# Altium PCB PCB2.PcbDoc
Units mm, origin at the board's own origin, x right, y up, seen from the top; angles counter-clockwise.
Board outline 41.27 x 16 mm, 2 copper layers (Top Layer, Bottom Layer); 37 components, 26 nets, 124 pads, 11 vias.
Unrouted connection lines stored in the file: 7.
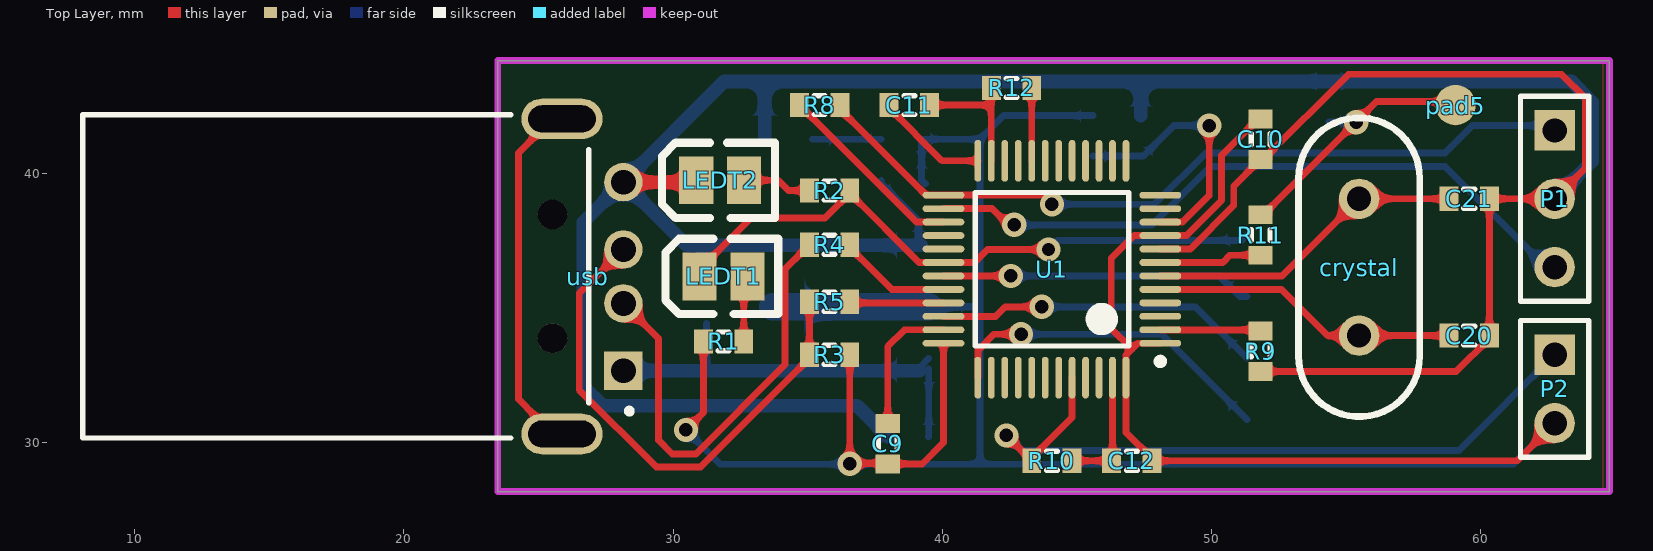
[diagram p0: Top Layer view]
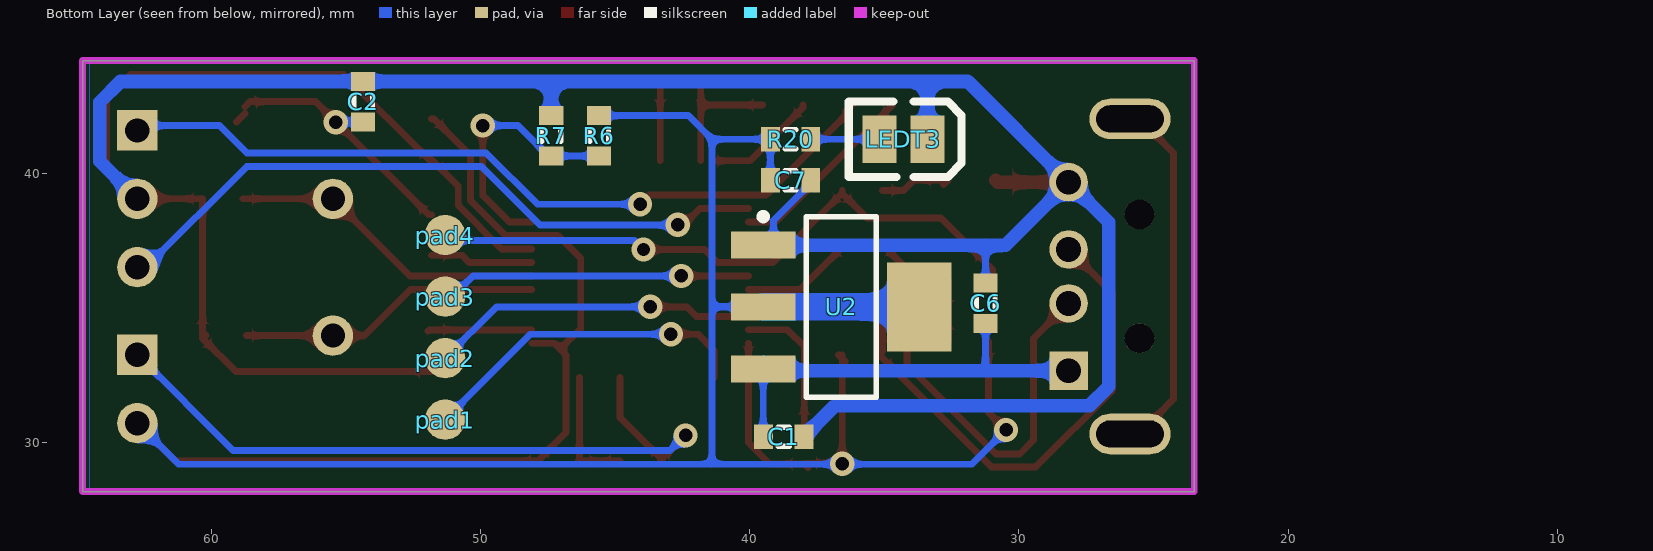
[diagram p1: Bottom Layer view, seen from below]

## Layer stack, top to bottom
Top Solder: solder mask 0.0102, Solder Resist, Dk 3.5
Top Layer: signal copper 0.0356
Dielectric 1: dielectric 0.32, FR-4, Dk 4.8
Bottom Layer: signal copper 0.0356
Bottom Solder: solder mask 0.0102, Solder Resist, Dk 3.5

## Board outline
23.495,44.196 64.77,44.196 64.77,28.194 23.495,28.194

## Design rules (kind name [scope] priority, off if disabled: settings)
Clearance [All] p1: gap=0.2 ignorepadtopadclearanceinfootprint=FALSE
PolygonConnect [All] p1: connectstyle=Direct reliefconductorwidth=0.254 reliefentries=4 polygonreliefangle="90 Angle" airgapwidth=0.254
RoutingVias [All] p1: holewidth=0.711 width=1.27 viastyle="Through Hole" minholewidth=0.711 minwidth=1.27 maxholewidth=0.711 maxwidth=1.27
SolderMaskExpansion [All] p1: expansion=0.102
Width [All] p1: maxlimit=1.27 minlimit=0.254 preferedwidth=0.254
30 further rules are at their usual default settings.

## Components (designator, comment, footprint, x,y, rotation, side; value= is the part's Value field where it differs from the comment)
C1 "C0603" J1-0603 38.735,30.226 r180 bottom value=0.1uF
C2 "C0603" J1-0603 54.356,42.672 r270 bottom value=0.1uF
C6 "10uF" J1-0603 31.242,35.181 r90 bottom value=1.0uF
C7 "10uF" J1-0603 38.481,39.751 r180 bottom value=1.0uF
C9 "C0603" J1-0603 37.973,29.972 r270 top value=0.1uF
C10 "C0603" J1-0603 51.816,41.275 r90 top value=0.1uF
C11 "C0603" J1-0603 38.775,42.545 r180 top value=0.1uF
C12 "C0603" J1-0603 47.038,29.337 r0 top value=0.1uF
C20 "C0603" J1-0603 59.563,33.984 r180 top value=20pF
C21 "C0603" J1-0603 59.563,39.064 r180 top value=20pF
crystal "clockProducerDeep" "deep crystal" 55.626,36.449 r0 top
LEDT1 "" 3518 31.877,36.183 r180 top
LEDT2 "" 3518 31.75,39.751 r180 top
LEDT3 "" 3518 34.29,41.275 r180 bottom
P1 "Header 3" HDR1X3 62.738,41.604 r270 top
P2 "Header 2" HDR1X2 62.738,33.274 r270 top
pad1 "pad" pad!#1 51.308,30.861 r270 bottom
pad2 "pad" pad!#1 51.308,33.147 r270 bottom
pad3 "pad" pad!#1 51.308,35.433 r270 bottom
pad4 "pad" pad!#1 51.308,37.719 r270 bottom
pad5 "pad" pad!#2 59.055,42.545 r90 bottom
R1 "Res1" j1-0603 31.877,33.77 r0 top value=220
R2 "Res1" j1-0603 35.814,39.37 r180 top value=220
R3 "Res1" J1-0603 35.814,33.274 r0 top value=1.5k
R4 "Res1" J1-0603 35.814,37.359 r0 top value=22
R5 "Res1" J1-0603 35.814,35.238 r0 top value=22
R6 "Res1" J1-0603 45.593,41.402 r90 bottom value=47K
R7 "Res1" J1-0603 47.371,41.402 r270 bottom value=47k
R8 "Res1" J1-0603 35.445,42.545 r0 top value=330
R9 "Res1" J1-0603 51.816,33.401 r90 top value=10K
R10 "Res1" J1-0603 44.069,29.337 r0 top value=100K
R11 "Res1" J1-0603 51.816,37.719 r90 top value=100k
R12 "Res1" J1-0603 42.573,43.18 r180 top value=10K
R20 "Res1" j1-0603 38.481,41.275 r180 bottom value=220
U1 "STM32F103C8T6TR" STM-LQFP48_L 44.069,36.449 r180 top locked
U2 "REG1117-3.3" SOT223 36.597,35.052 r180 bottom
usb "usb_typeA_Deep" usb_typeA_Deep 17.957,36.231 r270 top locked

## Footprints (in the part's own frame and the unit in brackets; to place one, negate y for a bottom-side part, rotate by r counter-clockwise, add the part's x,y. Pads: shape width x height; smd on the part's side, far side on the other; paste and mask are expansions set on the pad)
3518 [mil]
  rect 50x70 smd: 1(35,0) 2(-35,0)
  silkscreen extent -80,-55 85,55
"deep crystal" [mm]
  round 1.5 hole 0.9: 1(-0.15,-2.465) 2(-0.15,2.615)
  silkscreen extent -2.4,-5.47 2.1,5.62, body extent -2.44,-5.46 2.16,5.54, height 3.8
HDR1X2 [mm] "Connector; Header; 2 Position"
  rect 1.5x1.5 hole 0.9: 1(0,0)
  round 1.5 hole 0.9: 2(2.54,0)
  silkscreen extent -1.27,-1.27 3.81,1.27
HDR1X3 [mm] "Connector; Header; 3 Position"
  rect 1.5x1.5 hole 0.9: 1(0,0)
  round 1.5 hole 0.9: 2(2.54,0) 3(5.08,0)
  silkscreen extent -1.27,-1.27 6.35,1.27
J1-0603 [mm] "Chip Resistor, Body 1.6x0.8mm, IPC High Density"
  rect 0.7x0.9 smd: 1(-0.75,0) 2(0.75,0)
  silkscreen extent -0.2,-0.35 0.2,0.35, body extent -0.85,-0.48 0.85,0.48, height 0.9
j1-0603 [mm] "Chip Resistor, Body 1.6x0.8mm, IPC High Density"
  rect 0.7x0.9 smd: 1(-0.75,0) 2(0.75,0)
  silkscreen extent -0.2,-0.35 0.2,0.35, body extent -0.85,-0.48 0.85,0.48, height 0.9
pad!#1 [mm]
  round 1.5 smd: 1(0,0)
pad!#2 [mm]
  round 1.5 smd far side: 1(0,0)
SOT223 [mm] "SOT223, 4-Leads, Body 6.7x7.3mm (max), Pitch 2.30mm, IPC Medium Density"
  rect 2.4x1 smd: 1(-2.9,2.3) 2(-2.9,0) 3(-2.9,-2.3)
  rect 2.4x3.3 smd: 4(2.9,0)
  silkscreen extent -3.03,-3.35 1.3,3.47, body extent -1.85,-3.35 1.85,3.35, height 1.8
STM-LQFP48_L [mm] "QFP, 48-Leads, Body 7x7mm, Pitch 0.5mm, IPC High Density"
  oval 1.55x0.25 smd: 1(-4.025,2.75) 2(-4.025,2.25) 3(-4.025,1.75) 4(-4.025,1.25) 5(-4.025,0.75) 6(-4.025,0.25) 7(-4.025,-0.25) 8(-4.025,-0.75) 9(-4.025,-1.25) 10(-4.025,-1.75) 11(-4.025,-2.25) 12(-4.025,-2.75) 25(4.025,-2.75) 26(4.025,-2.25) 27(4.025,-1.75) 28(4.025,-1.25) 29(4.025,-0.75) 30(4.025,-0.25) 31(4.025,0.25) 32(4.025,0.75) 33(4.025,1.25) 34(4.025,1.75) 35(4.025,2.25) 36(4.025,2.75)
  oval 0.25x1.55 smd: 13(-2.75,-4.025) 14(-2.25,-4.025) 15(-1.75,-4.025) 16(-1.25,-4.025) 17(-0.75,-4.025) 18(-0.25,-4.025) 19(0.25,-4.025) 20(0.75,-4.025) 21(1.25,-4.025) 22(1.75,-4.025) 23(2.25,-4.025) 24(2.75,-4.025) 37(2.75,4.025) 38(2.25,4.025) 39(1.75,4.025) 40(1.25,4.025) 41(0.75,4.025) 42(0.25,4.025) 43(-0.25,4.025) 44(-0.75,4.025) 45(-1.25,4.025) 46(-1.75,4.025) 47(-2.25,4.025) 48(-2.75,4.025)
  silkscreen extent -4.15,-2.85 2.85,3.55, body extent -3.5,-3.5 3.5,3.5, height 1.6
usb_typeA_Deep [mm]
  rect 1.428x1.428 hole 0.92: 01(3.55,10.2)
  round 1.428 hole 0.92: 02(1.05,10.2) 03(-0.95,10.2) 04(-3.45,10.2)
  oval 1.508x3.016 hole 1 slot 2.5 at 90 deg: S1(-5.8,7.92) S2(5.9,7.92)
  round 1.1 hole 1.1 unplated: ""(-2.25,7.57) ""(2.35,7.57)
  silkscreen extent -5.95,-9.88 6.05,10.52

## Part data
C1 C2 C9 C10 C11 C12 C20 C21: "Ceramic Chip Capacitor - Standard", PackageDocument=Mar-2001, Code_IPC="1608 [0603]", Code_JEITA=0603, ComponentLink1Description="Manufacturer Link", ComponentLink1URL=http://www.kemet.com/, ComponentLink2Description=Datasheet, ComponentLink2URL=http://www.kemet.com/kemet/web/homepage/kechome.nsf/vapubfilesname/F3102TA.pdf/$file/F3102TA.pdf, DatasheetDocument=Mar-2001, LatestRevisionDate=19-Mar-2004, LatestRevisionNote="Silkscreen size reduced.", Note="Footprint corresponds to dimensions for bulk cassette packaging. This case size has tightened tolerances.", PackageReference=0603, Published=17-Jul-2002, Publisher="Altium Limited"
C6 C7: library part 194D105X0015B2, ComponentLink1Description="Manufacturer Link", ComponentLink1URL=http://www.vishay.com/, ComponentLink2Description=Datasheet, ComponentLink2URL=http://www.vishay.com/docs/40000/194d.pdf, DatasheetDocument=05-Jul-2002, Note="See Data Sheet for full range of components", PackageReference=B, Published=19-Mar-2004, Publisher="Altium Limited"
crystal: library part "deep crystal"
LEDT1 LEDT2 LEDT3: library part LED3, "Typical BLUE SiC LED", PackageDocument=16-Apr-2002, DatasheetDocument=16-Apr-2002, LatestRevisionDate=17-Dec-2003, LatestRevisionNote="PCB Footprint replaced.", PackageReference=3.5X2.8X1.9, Published=8-Jun-2000, Publisher="Altium Limited"
P1: "Header, 3-Pin", LatestRevisionDate=17-Jul-2002, LatestRevisionNote="Re-released for DXP Platform.", Publisher="Altium Limited"
P2: "Header, 2-Pin", LatestRevisionDate=17-Jul-2002, LatestRevisionNote="Re-released for DXP Platform.", Publisher="Altium Limited"
pad1 pad2 pad3 pad4 pad5: library part pad!, "test pad"
R1 R2 R3 R4 R5 R6 R7 R8 R9 R10 R11 R12 R20: "Resistor", LatestRevisionDate=17-Jul-2002, LatestRevisionNote="Re-released for DXP Platform.", PackageReference=AXIAL-0.3, Published=8-Jun-2000, Publisher="Altium Limited"
  R3 R4 R5 R6 R7 R8 R9 R10 R11 R12: PackageDescription="Axial Device, Thru-Hole; 2 Leads; 0.3 in Pin Spacing"
U1: "ARM Cortex-M3 32-bit MCU, 64 KB Flash, 20 KB Internal RAM, 37 I/Os, 48-pin LQFP, -40 to 85 degC, Tape and Reel", I/Os (High Current)=37, Operating Frequency(F) (Processor speed) (MHz)=72, Supplier Part Number 1=STM32F103C8T6TR-ND, Supply Voltage(Vcc) min (V)=2, A/D Converter="2x12-bit (10 Channel)", ComponentLink1Description="Manufacturer URL", ComponentLink1URL=http://www.st.com/web/en/home.html, ComponentLink2Description=Datasheet, ComponentLink2URL=http://www.st.com/st-web-ui/static/active/en/resource/technical/document/datasheet/CD00161566.pdf, ComponentLink3Description="Package Specification", ComponentLink3URL=http://www.st.com/st-web-ui/static/active/en/resource/technical/document/datasheet/DM00058181.pdf, Core="ARM Cortex-M3", DatasheetVersion="Rev. 16", FLASH Size (Prog) (kB)=64, Internal RAM Size (kB)=20, Mounting Technology="Surface Mount", PackageDescription="48-Pin Low Profile Quad Flat Package, 7 x 7 mm Body, 0.5 mm Pitch", PackageReference=LQFP48, PackageVersion="Rev. 6, 06/2013", Packing="Tape and Reel", PartNumber=STM32F103C8T6TR, Supplier 1=Digi-Key, Supplier 2=Mouser, Supplier Part Number 2=511-STM32F103C8T6TR
U2: "800mA and 1A Low Dropout Positive Regulator 2.85V, 3.3V, 5V, and Adjustable", ComponentLink1Description="Manufacturer Link", ComponentLink1URL=http://www.ti.com/, ComponentLink2Description=Datasheet, ComponentLink2URL=http://www-s.ti.com/sc/ds/REG1117.pdf, DatasheetVersion=Sep-1997, LatestRevisionDate=17-Jul-2002, LatestRevisionNote="Re-released for DXP Platform.", PackageDescription="SOT-223/SC-73; 4 Leads; Body 6.7 x 7.3 mm, inc. leads (LxW max)", PackageReference=ZZ311, PackageVersion=revC, Published=8-Jun-2000, Publisher="Altium Limited"

## Via types
v1: diameter 0.9, hole 0.5, Top Layer to Bottom Layer, 11 vias

## Nets (pads, with @x,y where several pads share a name; then routed paths per layer and width w, separated by ;. In a path a pad name is that pad's centre, name@x,y a point inside that pad or via, vN(x,y) a via of type N, cw(c..) or ccw(c..) an arc to the next point about the centre after c; other vN are vias at no path point)
+3V3: C7.1 C9.2 C10.2 C11.2 C12.2 P2.2 R1.1 R3.2 R6.2 R20.1 U1.1 U1.9 U1.24 U1.36 U1.48 U2.2 U2.4 | length 115.3
  Top Layer w0.254: v1(30.48,30.48) 31.127,31.127 R1.1 ; R3.2@36.449,33.02 R3.2@36.564,33.135 ; R3.2 R3.2@36.564,33.135 ; R3.2@36.691,33.274 36.697,33.268 R3.2@36.564,33.135 ; C9.2@37.84,29.083 C9.2@37.973,29.216 ; C9.2@37.84,29.183 C9.2@37.934,29.183 ; C9.2@37.91,29.158 C9.2@37.934,29.183 ; C11.2 38.025,42.445 39.996,40.474 U1.24 ; U1.36 40.044,30.011 39.255,29.222 C9.2 ; U1.1 47.257,33.699 47.038,33.48 ; C10.2 51.716,42.025 50.365,40.674 50.365,39.002 49.064,37.701 48.096,37.701 U1.9 48.092,37.697 47.125,37.697 46.271,36.843 46.271,34.247 47.038,33.48 ; P2.2 61.341,29.337 60.579,29.337 47.867,29.337 46.819,30.385 U1.48 46.819,33.261 47.038,33.48 ; R3.2@36.564,33.135 v1(36.564,29.222) 36.588,29.246 37.949,29.246 C9.2 ; C9.2@37.934,29.183 C9.2
  Bottom Layer w0.254: v1(30.48,30.48) 31.75,29.21 41.402,29.21 ; C7.1 R20.1 41.402,41.275 ; C7.1@39.241,39.751 C7.1@39.37,39.622 ; U2.2 41.402,35.052 ; R6.2 42.279,42.152 41.402,41.275 ; P2.2 61.214,29.21 41.402,29.21 ; 41.402,29.21 41.402,35.052 ; 41.402,35.052 41.402,39.751 41.402,41.275
  Bottom Layer w1.016: U2.4 U2.2
+5V_USB: C1.1 C6.1 U2.3 usb.01 | length 15.7
  Bottom Layer w0.254: 31.242,32.681 C6.1 ; U2.3@39.163,32.808 U2.3@39.488,33.133 ; C1.1 39.497,30.238 U2.3
  Bottom Layer w0.508: usb.01 31.242,32.681 U2.3@39.151,32.681
BOOT0: P2.1 R10.1 U1.44 | length 28
  Top Layer w0.254: v1(42.379,30.277) R10.1 43.319,29.437 44.819,30.937 U1.44 44.817,32.422 44.817,31.478
  Bottom Layer w0.254: v1(42.379,30.277) 42.406,30.277 42.965,29.718 59.182,29.718 P2.1
GND: C1.2 C2.1 C6.2 C7.2 C9.1 C10.1 C11.1 C12.1 C20.1 C21.1 LEDT2.1 LEDT3.1 P1.2 R7.1 R9.1 R10.2 R12.2 U1.8 U1.23 U1.35 U1.47 U2.1 usb.04 | length 140.1
  Top Layer w0.254: C9.1 37.973,33.572 38.6,34.199 U1.35 ; C11.1 41.819,42.545 ; U1.23 41.819,42.545 ; R12.2@41.819,43.053 41.819,42.545 ; R12.2@41.819,43.18 R12.2 ; R10.2 46.271,29.337 C12.1@46.319,29.385 ; U1.47 C12.1@46.319,29.385 ; C12.1@46.367,29.337 C12.1@46.319,29.385 ; U1.8@48.092,37.197 U1.8 48.096,37.201 49.206,37.201 50.819,38.814 50.819,39.528 C10.1 51.916,40.525 55.079,43.688 62.992,43.688 63.881,42.799 63.881,40.207 P1.2 C21.1 60.313,34.111 C20.1@60.186,33.984 ; R9.1 59.08,32.651 60.313,33.884 C20.1 ; P1.2@62.282,39.362 P1.2@62.611,39.362
  Top Layer w0.508: usb.04 30.791,39.681 LEDT2.1
  Bottom Layer w0.254: C6.2 31.242,37.338 ; C7.2 37.731,39.651 39.116,38.266 U2.1@39.116,37.246
  Bottom Layer w0.508: LEDT3.1 33.401,43.422 ; C1.2 36.827,31.384 27.384,31.384 26.67,32.098 26.67,38.194 usb.04 ; U2.1@39.208,37.338 31.242,37.338 30.5,37.338 usb.04 ; R7.1 47.371,43.422 ; P1.2 64.135,40.461 64.135,42.647 63.36,43.422 C2.1 47.371,43.422 ; usb.04 31.898,43.422 33.401,43.422 ; 33.401,43.422 47.371,43.422
NetC20_2: C20.2 crystal.1 U1.5 | length 11.3
  Top Layer w0.254: U1.5 52.594,35.699 54.309,33.984 crystal.1 C20.2@58.686,33.984
NetC21_2: C21.2 crystal.2 U1.6 | length 11.9
  Top Layer w0.254: U1.6 52.611,36.199 crystal.2 C21.2
NetLEDT1_1: LEDT1.2 R1.2 | length 2.5
  Top Layer w0.254: R1.2 32.627,36.044 LEDT1.2
NetLEDT2_1: LEDT2.2 R2.2 | length 2.8
  Top Layer w0.254: LEDT2.2@32.797,39.593 LEDT2.2 33.909,39.751 34.29,39.37 R2.2
NetLEDT3_1: LEDT3.2 R20.2 | length 2.6
  Bottom Layer w0.254: LEDT3.2 R20.2
NetR3_1: R3.1 R5.1 usb.03 | length 19.5
  Top Layer w0.254: usb.03 26.518,35.542 26.518,31.973 29.379,29.112 31.029,29.112 35.191,33.274 35.064,33.401 R5.1
NetR4_1: R4.1 usb.02 | length 16.7
  Top Layer w0.254: usb.02 29.464,33.874 29.464,30.099 29.972,29.591 30.849,29.591 34.163,32.905 34.163,36.458 R4.1
NetR6_1: R6.1 R7.2 U1.10 | length 9.6
  Top Layer w0.254: U1.10 48.92,38.199 49.911,39.19 v1(49.911,41.783)
  Bottom Layer w0.254: R6.1 R7.2 47.471,40.652 48.602,41.783 v1(49.911,41.783)
NetR8_1: R8.1 U1.27 | length 7.1
  Top Layer w0.254: R8.1 39.039,38.201 40.042,38.201 U1.27
NetR9_2: R9.2 U1.2 | length 3.9
  Top Layer w0.254: U1.2 48.096,34.197 51.897,34.197 R9.2@51.943,34.151
NetR11_1: R11.1 U1.7 | length 3.8
  Top Layer w0.254: U1.7 50.415,36.699 50.685,36.969 R11.1
NetR12_1: R12.1 U1.20 | length 2.7
  Top Layer w0.254: U1.20 43.321,40.476 43.321,43.178 R12.1
Netusb_S1: usb.S1 usb.S2 | length 13.7
  Top Layer w0.254: usb.S2 25.168,30.331 24.892,30.607 24.892,30.988 24.257,31.623 24.257,40.767 25.521,42.031 usb.S1
RST: C2.2 pad5.1 R11.2 | length 10.2
  Top Layer w0.254: R11.2 51.916,38.469 56.119,42.672 58.547,42.672 pad5.1@58.737,42.481 ; pad5.1@58.737,42.227 pad5.1@59.055,41.91
  Bottom Layer w0.254: C2.2 54.362,41.916 55.366,41.916 v1(55.372,41.91)
Rx: pad3.1 U1.31 | length 11.6
  Top Layer w0.254: U1.31 v1(42.545,36.199)
  Bottom Layer w0.254: v1(42.545,36.199) 50.28,36.199 51.046,35.433 pad3.1
STLink_LED: LEDT1.1 pad4.1 R2.1 U1.30 | length 23.3
  Top Layer w0.254: LEDT1.1 30.988,36.437 32.905,38.354 35.648,38.354 R2.1@36.564,39.27 ; R2.1 R2.1@36.564,39.27 ; v1(43.942,37.181) 41.672,37.181 41.19,36.699 U1.30 40.042,36.701 39.133,36.701 R2.1@36.564,39.27
  Bottom Layer w0.254: v1(43.942,37.181) 44.28,37.519 51.108,37.519 pad4.1
SWCLK: pad1.1 U1.37 | length 12.6
  Top Layer w0.254: U1.37 41.321,32.426 41.321,33.432 41.925,34.036 v1(42.926,34.036)
  Bottom Layer w0.254: v1(42.926,34.036) 48.133,34.036 pad1.1
SWDIO: pad2.1 U1.34 | length 12.2
  Top Layer w0.254: U1.34 41.982,34.699 42.335,35.052 v1(43.688,35.052)
  Bottom Layer w0.254: v1(43.688,35.052) 49.403,35.052 pad2.1
T_JTCLK: P1.3 U1.26 | length 25.4
  Top Layer w0.254: U1.26 41.844,38.699 42.443,38.1 v1(42.672,38.1)
  Bottom Layer w0.254: v1(42.672,38.1) 42.687,38.085 47.789,38.085 49.963,40.259 58.674,40.259 62.409,36.524 P1.3
T_JTMS: P1.1 R8.2 U1.25 | length 29.4
  Top Layer w0.254: R8.2 36.418,42.322 36.418,42.179 39.398,39.199 U1.25 43.732,39.199 v1(44.069,38.862)
  Bottom Layer w0.254: v1(44.069,38.862) 47.879,38.862 49.784,40.767 58.674,40.767 59.69,41.783 62.559,41.783 P1.1
USB_D+: R5.2 U1.33 | length 3.5
  Top Layer w0.254: R5.2@36.564,35.365 36.73,35.199 U1.33
USB_D-: R4.2 U1.32 | length 4.2
  Top Layer w0.254: R4.2 36.564,37.259 38.124,35.699 U1.32
pads on no net: U1.3 U1.4 U1.11 U1.12 U1.13 U1.14 U1.15 U1.16 U1.17 U1.18 U1.19 U1.21 U1.22 U1.28 U1.29 U1.38 U1.39 U1.40 U1.41 U1.42 U1.43 U1.45 U1.46 usb.

## Polygon pours and split planes (outlines as drawn)
GND on Top Layer "Top Layer-No Net" (solid, shelved, pour order 6): 23.495,44.196 64.516,44.196 64.516,28.194 23.495,28.194
GND on Bottom Layer "Top Layer-No Net1" (solid, shelved, pour order 7): 23.495,44.196 64.516,44.196 64.516,28.194 23.495,28.194

## Keep-outs
Keep-Out Layer:
  the board outline again, w0.254

## Silkscreen, mask and mechanical layers (free items; w line width, h text height)
Top Overlay: